# EAGLE board ESC_BOARD (EAGLE 9.1.2)
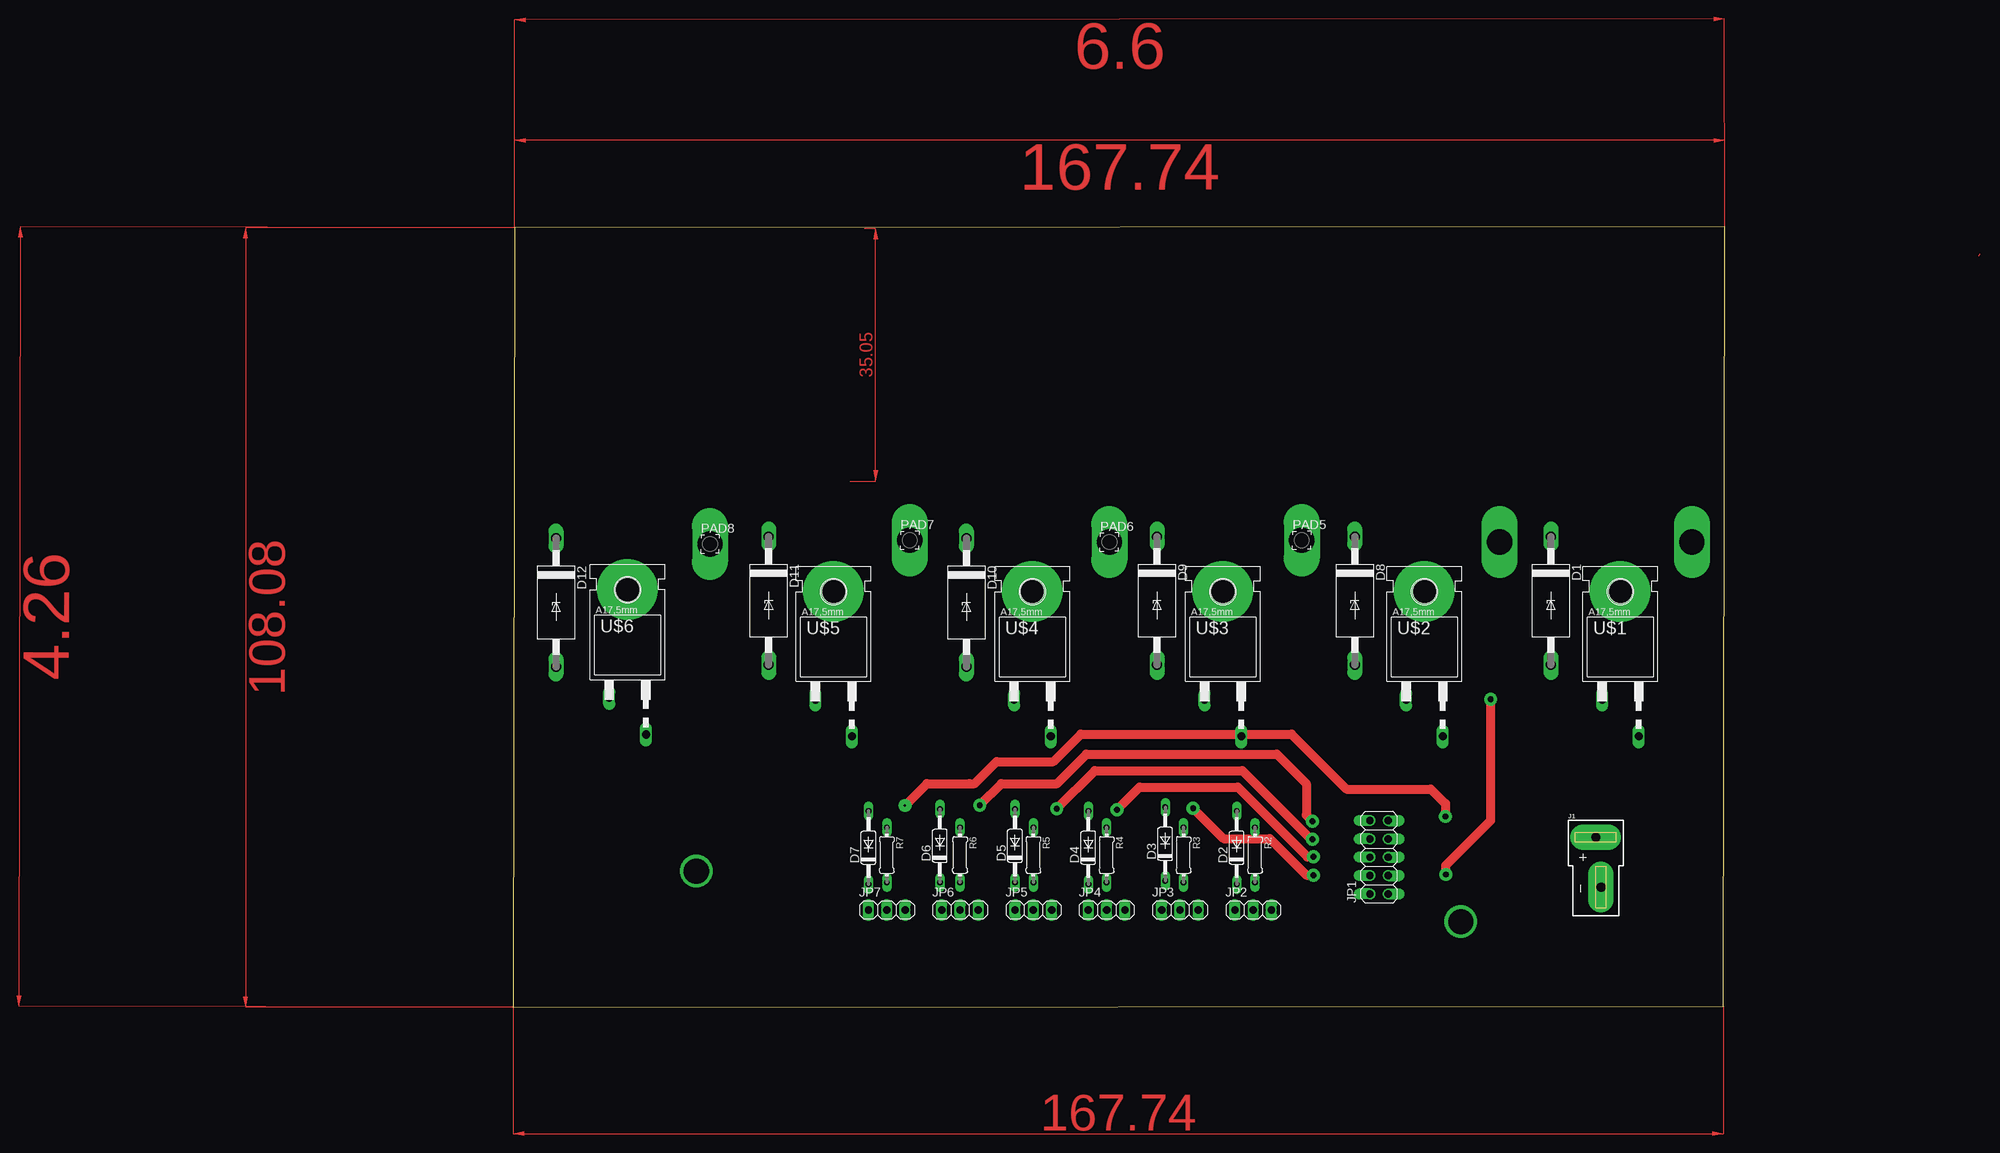
[diagram p0: board, top side]
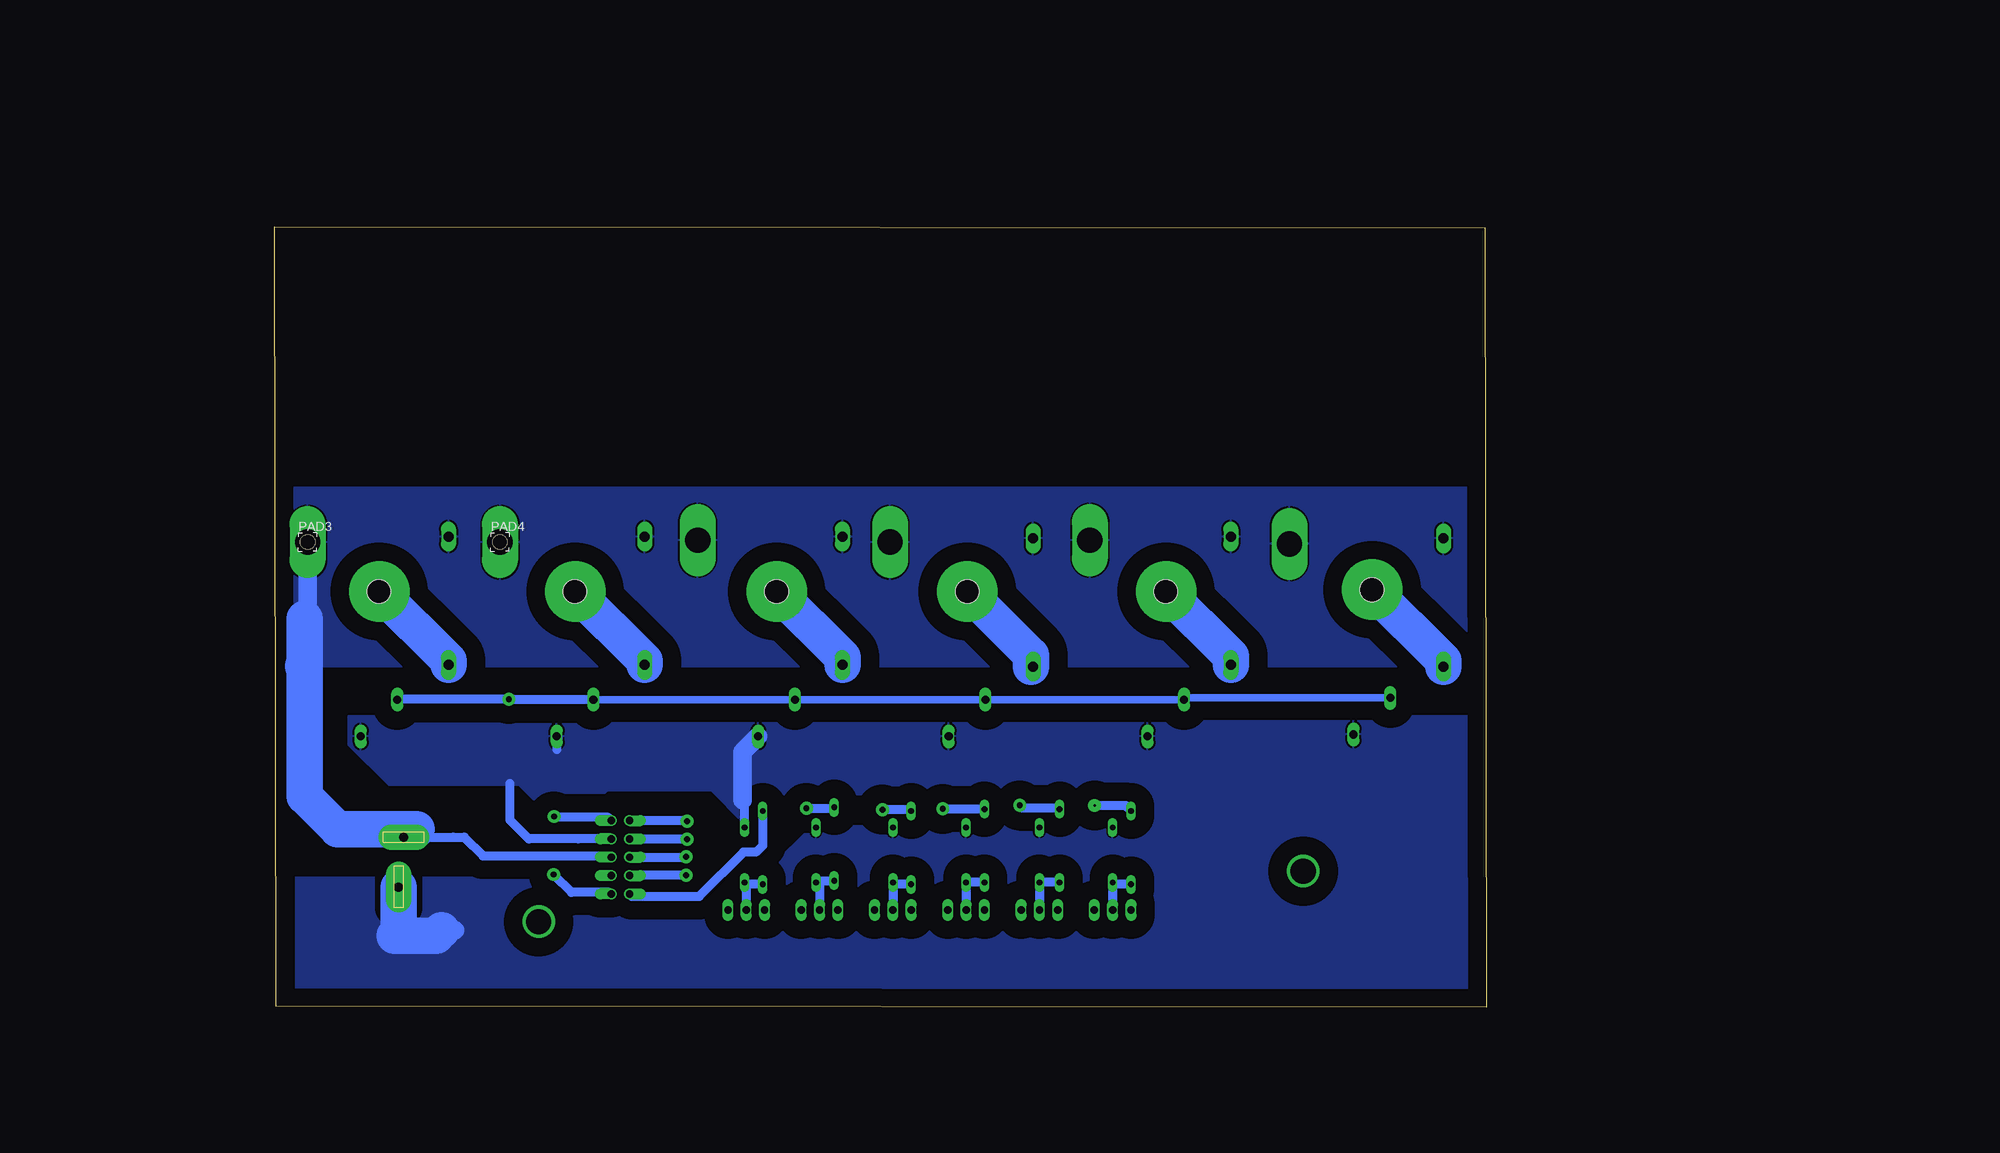
[diagram p1: board, bottom side, seen from below]

Size 167.94 x 108.21 mm. Coordinates in mm from the lower left corner, seen from the top.
Outline: 0,0 167.74,0.12 167.94,108.21 0.21,108.08 0,0
Copper layers (1*16): Top 0.035mm / dielectric 1.5mm / Bottom 0.035mm
Design rules "default *": minimum track width 6mil, minimum drill 0.35mm, track to track 12mil, track to pad 12mil, pad to pad 12mil, via to via 12mil, smd to smd 12mil, copper to edge 40mil, drill to drill 6mil, minimum pad ring 10mil, minimum via ring 8mil, stop-mask expansion 4mil, vias tented up to drill 0mil, thermal gap 10mil

## Footprints (pad centres in the part's own frame; a part is rotated, then mirrored left to right if it is on the bottom)
CB429-17 = drill 1.397 long: A 8.89,0; C -8.89,0
DO35-10 = drill 0.813 long: A 5.08,0; C -5.08,0
DEANS = drill 1.27 pad 3.556 long: + 0,0; - 0.737,-6.921
2X05 = drill 1.016 offset: 1 -5.08,-1.27; 2 -5.08,1.27; 3 -2.54,-1.27; 4 -2.54,1.27; 5 0,-1.27; 6 0,1.27; 7 2.54,-1.27; 8 2.54,1.27; 9 5.08,-1.27; 10 5.08,1.27
1X03 = drill 1.016 long: 1 -2.54,0; 2 0,0; 3 2.54,0
2,54/1,1 = drill 3.5 pad 5 long: 1 0,0
0204/7 = drill 0.813 long: 1 -3.81,0; 2 3.81,0
IRF540 = drill 1.118 long: 1 -2.54,-2.54; 3 2.54,-7.62 | drill 3.2 pad 8.382: 2 -0.025,12.446 | hole 3.302: 0,12.446

## Placement (x,y rotation side)
D1  [CB429-17]  143.85,56.36 270 top
D2  1N4446  [DO35-10]  100.29,22.13 90 top
D3  1N4446  [DO35-10]  90.38,22.64 90 top
D4  1N4446  [DO35-10]  79.72,22.13 90 top
D5  1N4446  [DO35-10]  69.56,22.39 90 top
D6  1N4446  [DO35-10]  59.14,22.39 90 top
D7  1N4446  [DO35-10]  49.24,22.13 90 top
D8  [CB429-17]  116.67,56.36 270 top
D9  [CB429-17]  89.24,56.36 270 top
D10  [CB429-17]  62.82,56.11 270 top
D11  [CB429-17]  35.39,56.36 270 top
D12  [CB429-17]  5.93,56.11 270 top
J1  [DEANS]  150.07,23.59 0 top
JP1  [2X05]  120.04,20.81 90 top
JP2  [1X03]  102.58,13.5 0 top
JP3  [1X03]  92.42,13.5 0 top
JP4  [1X03]  82.26,13.5 0 top
JP5  [1X03]  72.1,13.5 0 top
JP6  [1X03]  61.94,13.5 0 top
JP7  [1X03]  51.78,13.5 0 top
PAD3  [2,54/1,1]  163.41,64.49 0 bottom
PAD4  [2,54/1,1]  136.74,64.49 0 bottom
PAD5  [2,54/1,1]  109.3,64.75 0 top
PAD6  [2,54/1,1]  82.63,64.49 0 top
PAD7  [2,54/1,1]  54.95,64.75 0 top
PAD8  [2,54/1,1]  27.26,64.24 0 top
R2  10K  [0204/7]  102.83,21.12 270 top
R3  10K  [0204/7]  92.92,21.12 270 top
R4  10K  [0204/7]  82.26,21.12 270 top
R5  10K  [0204/7]  72.1,21.12 270 top
R6  10K  [0204/7]  61.94,21.12 270 top
R7  10K  [0204/7]  51.78,21.12 270 top
U$1  TO220  [IRF540]  153.5,45.19 0 top
U$2  TO220  [IRF540]  126.32,45.19 0 top
U$3  TO220  [IRF540]  98.38,45.19 0 top
U$4  TO220  [IRF540]  71.97,45.19 0 top
U$5  TO220  [IRF540]  44.41,45.19 0 top
U$6  TO220  [IRF540]  15.83,45.44 0 top

## Library data of the parts
D1 D8-D12 = adafruit
D2-D7 = diode
J1 = SparkFun-Connectors; SF_ID: PRT-11864
JP1-JP7 = pinhead
PAD3-PAD8 = wirepad
R2-R7 = rcl
U$1-U$6 = IRF540

## Nets
ESC_1: D1.A U$1.2
ESC_1_SIGNAL: D2.A JP1.2
ESC_2: D8.A U$2.2
ESC_2_SIGNAL: D3.A JP1.4
ESC_3: D9.A U$3.2
ESC_3_SIGNAL: D4.A JP1.6
ESC_4: D10.A U$4.2
ESC_4_SIGNAL: D5.A JP1.8
ESC_5: D11.A U$5.2
ESC_5_SIGNAL: D6.A JP1.10
ESC_6: D12.A U$6.2
ESC_6_SIGNAL: D7.A JP1.9
ESC_BATTERY_MAIN: D1.C D8.C D9.C D10.C D11.C D12.C J1.+ JP1.5 PAD3.1 PAD4.1 PAD5.1 PAD6.1 PAD7.1 PAD8.1
ESC_GND: J1.- JP1.7 R2.1 R3.1 R4.1 R5.1 R6.1 R7.1 U$1.3 U$2.3 U$3.3 U$4.3 U$5.3 U$6.3
N$2: JP1.3
SIGNAL_1: D2.C JP2.2 R2.2
SIGNAL_2: D3.C JP3.2 R3.2
SIGNAL_3: D4.C JP4.2 R4.2
SIGNAL_4: D5.C JP5.2 R5.2
SIGNAL_5: D6.C JP6.2 R6.2
SIGNAL_6: D7.C JP7.2 R7.2
THRUSTER_ENABLE_ESC: JP1.1 U$1.1 U$2.1 U$3.1 U$4.1 U$5.1 U$6.1

## Tracks (layer width: path | path; a pad name or v marks a point on that pad's centre or on a via)
ESC_1
  Bottom 5.08: U$1.2 143.85,48.01 D1.A
ESC_1_SIGNAL
  Bottom 1.27: D2.A 100.29,22.46 100.56,22.19 101.25,21.5 102.99,21.5 109.12,15.37 118.41,15.37 JP1.2
ESC_2
  Bottom 5.08: U$2.2 116.67,48.01 D8.A
ESC_2_SIGNAL  (via drill 0.8 pad 1.78)
  Top 1.27: v94.24,27.61 98.48,23.38 104.89,23.38 109.94,18.32 v110.94,18.32 111.2,18.32
  Bottom 1.27: v94.24,27.61 90.5,27.61 D3.A | JP1.4 118.77,18.32 v110.94,18.32
ESC_3
  Bottom 5.08: U$3.2 89.24,48.51 D9.A
ESC_3_SIGNAL  (via drill 0.8 pad 1.78)
  Top 1.27: v83.69,27.39 86.81,30.51 100.45,30.51 110.09,20.87 v110.92,20.87
  Bottom 1.27: D4.A 79.98,27.47 83.61,27.47 v83.69,27.39 | JP1.6 110.98,20.81 v110.92,20.87
ESC_4
  Bottom 2.54: 63.08,47.22 D10.A
  Bottom 5.08: U$4.2 63.08,48.77 63.08,47.22
ESC_4_SIGNAL  (via drill 0.8 pad 1.78)
  Top 1.27: v75.33,27.52 80.61,32.8 101.06,32.8 110.55,23.3 v110.81,23.3
  Bottom 1.27: v75.33,27.52 69.56,27.52 D5.A | JP1.8 110.85,23.34 v110.81,23.3
ESC_5
  Bottom 5.08: U$5.2 35.39,48.64 D11.A
ESC_5_SIGNAL  (via drill 0.8 pad 1.78)
  Top 1.27: v110.78,25.79 109.94,26.63 109.94,31.01 105.86,35.08 79.45,35.08 75.38,31.02 67.68,31.02 v64.65,28
  Bottom 1.27: D6.A 59.32,27.65 64.31,27.65 v64.65,28 | JP1.10 110.88,25.88 v110.78,25.79
ESC_6
  Bottom 5.08: U$6.2 5.93,48.01 D12.A
ESC_6_SIGNAL  (via drill 0.35 pad 1.78, 0.8 pad 1.78)
  Top 1.27: v54.3,27.97 57.35,31.02 63.19,31.02 63.95,31.02 67,34.07 74.87,34.07 78.68,37.88 | 78.68,37.88 | 78.68,37.88 107.89,37.88 115.51,30.26 127.2,30.26 129.23,28.22 v129.23,26.45
  Bottom 1.27: D7.A 49.99,27.97 v54.3,27.97 | v129.23,26.45 129.23,26.39 121.82,26.39 JP1.9
ESC_BATTERY_MAIN
  Bottom 1.27: JP1.5 121.5,21 139.1,21 141.69,23.59 143.2,23.59 J1.+ | J1.+ 148.73,24.92 147.01,24.92 | J1.+ 158.12,23.59 159.2,24.67
  Bottom 2.54: PAD3.1 163.41,52.3 164.97,50.74
  Bottom 5.08: 164.03,47.27 163.77,47.53 | 163.77,47.53 163.77,53.88 | 163.77,47.53 163.77,29.24 159.2,24.67 148.28,24.67
  pour Bottom (isolate 2.54): -0.42,54.84 -0.42,47.22 169.76,47.22 169.76,72.11 -0.42,72.11
ESC_GND
  Bottom 1.27: 128.6,37.31 U$2.3 128.86,35.72 | JP1.7 125.88,23.35 132.73,23.35 135.33,25.94 135.33,31.02 | R2.1 102.83,28.49 103.07,28.73
  Bottom 2.54: 144.84,10.7 142.95,10.7 | 103.07,28.73 103.07,35.42 U$3.3
  Bottom 5.08: J1.- 150.8,10.46 151.33,9.94 145.6,9.94 144.84,10.7
  pour Bottom (isolate 2.54): 103.07,23.65 103.07,25.68 107.39,30 121.86,30 124.66,27.21 124.66,23.65 126.94,23.65 131.26,27.97 134.06,30.76 152.09,30.76 157.68,36.35 157.68,40.42 0.71,40.42 0.71,1.81 166.82,1.81 166.82,4.86 166.82,18.06 129.74,18.06 124.66,12.98 109.42,12.98 103.07,19.33 99.26,19.33 93.42,25.18 47.44,25.18 46.43,26.19 46.43,26.95 46.43,27.46 48.46,29.49 100.78,29.49 101.8,28.48 101.8,24.16 102.31,23.65
N$5
  Top 0.152: 203.14,104.17 203.4,104.42
N$24  (via drill 3.5)
  other vias: 131.36,11.87
N$25  (via drill 3.5)
  other vias: 25.36,18.87
SIGNAL_1
  Bottom 1.27: D2.C 102.58,17.05 | 102.58,17.05 JP2.2 | 102.58,17.05 R2.2
SIGNAL_2
  Bottom 1.27: JP3.2 92.42,16.8 R3.2 92.67,17.56 D3.C
SIGNAL_3
  Bottom 1.27: JP4.2 R4.2 82,17.05 D4.C
SIGNAL_4
  Bottom 1.27: D5.C R5.2 JP5.2
SIGNAL_5
  Bottom 1.27: D6.C R6.2 JP6.2
SIGNAL_6
  Bottom 1.27: JP7.2 R7.2 51.52,17.05 D7.C
THRUSTER_ENABLE_ESC  (via drill 0.8 pad 1.78)
  Top 1.27: v135.49,42.71 135.49,25.88 129.28,19.67 v129.28,18.4
  Bottom 1.016: U$6.1 41.61,42.9 U$5.1 U$4.1 U$3.1 U$2.1
  Bottom 1.27: U$2.1 135.55,42.65 v135.49,42.71 150.9,42.71 U$1.1 | JP1.1 121.51,15.93 126.8,15.93 v129.28,18.4
(copper drawn outside any net)
  shapes: Top area x6